# EAGLE board OVL_PANEL (EAGLE 7.7.0)
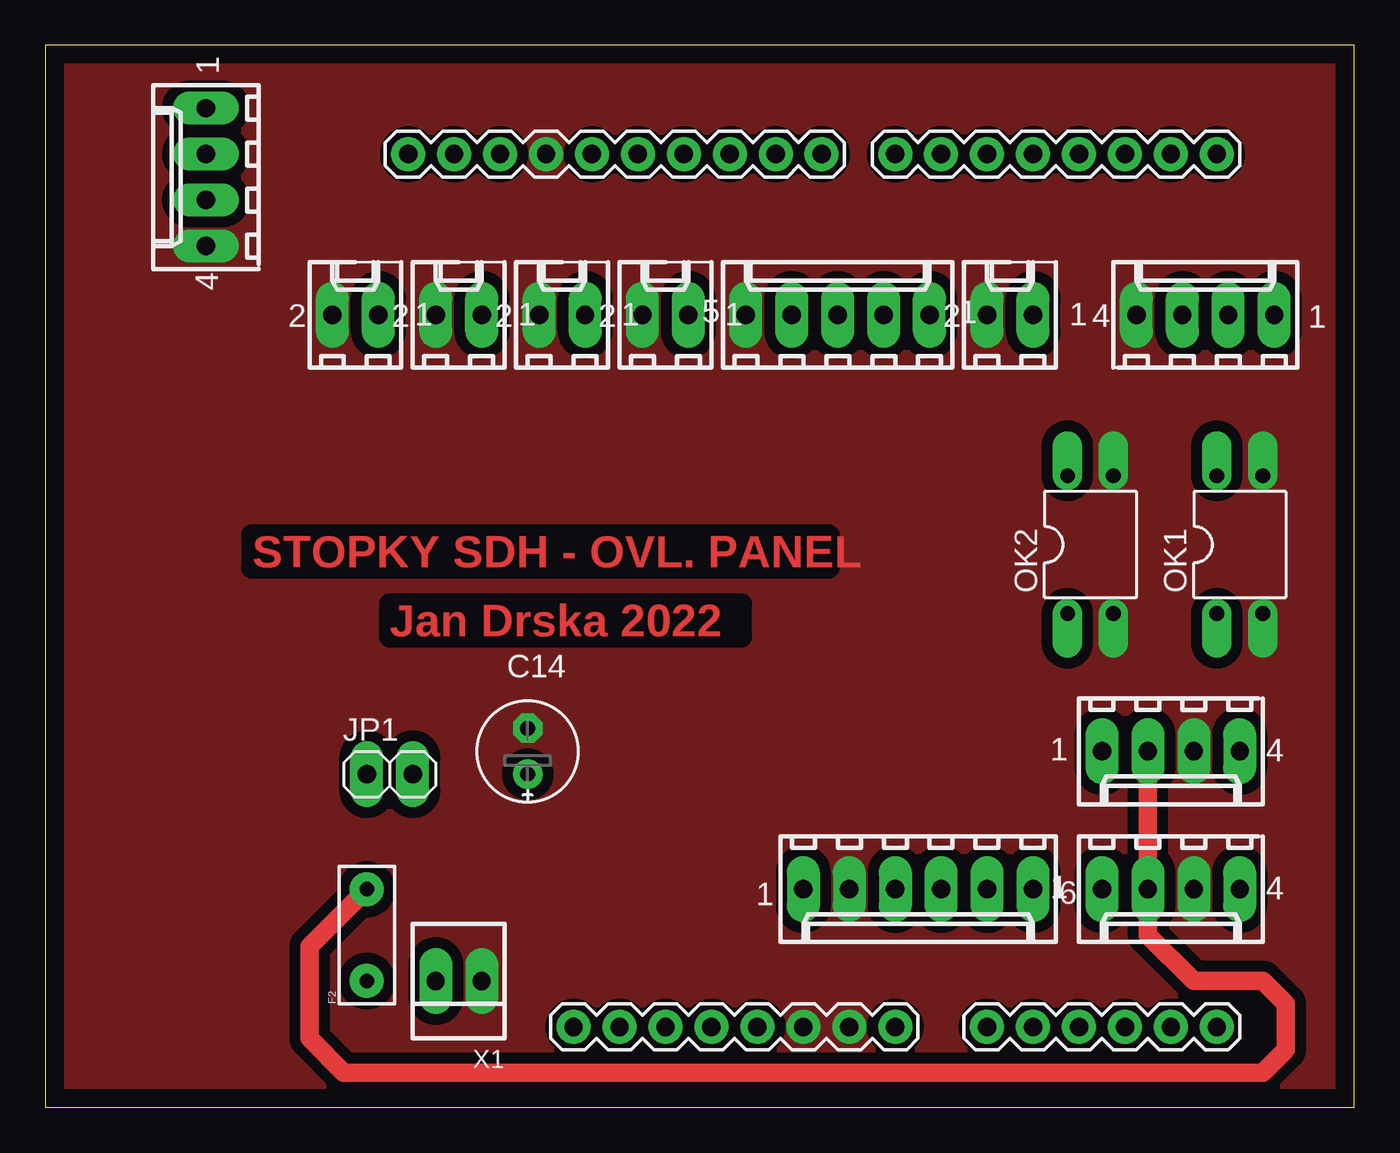
[diagram p0: board, top side]
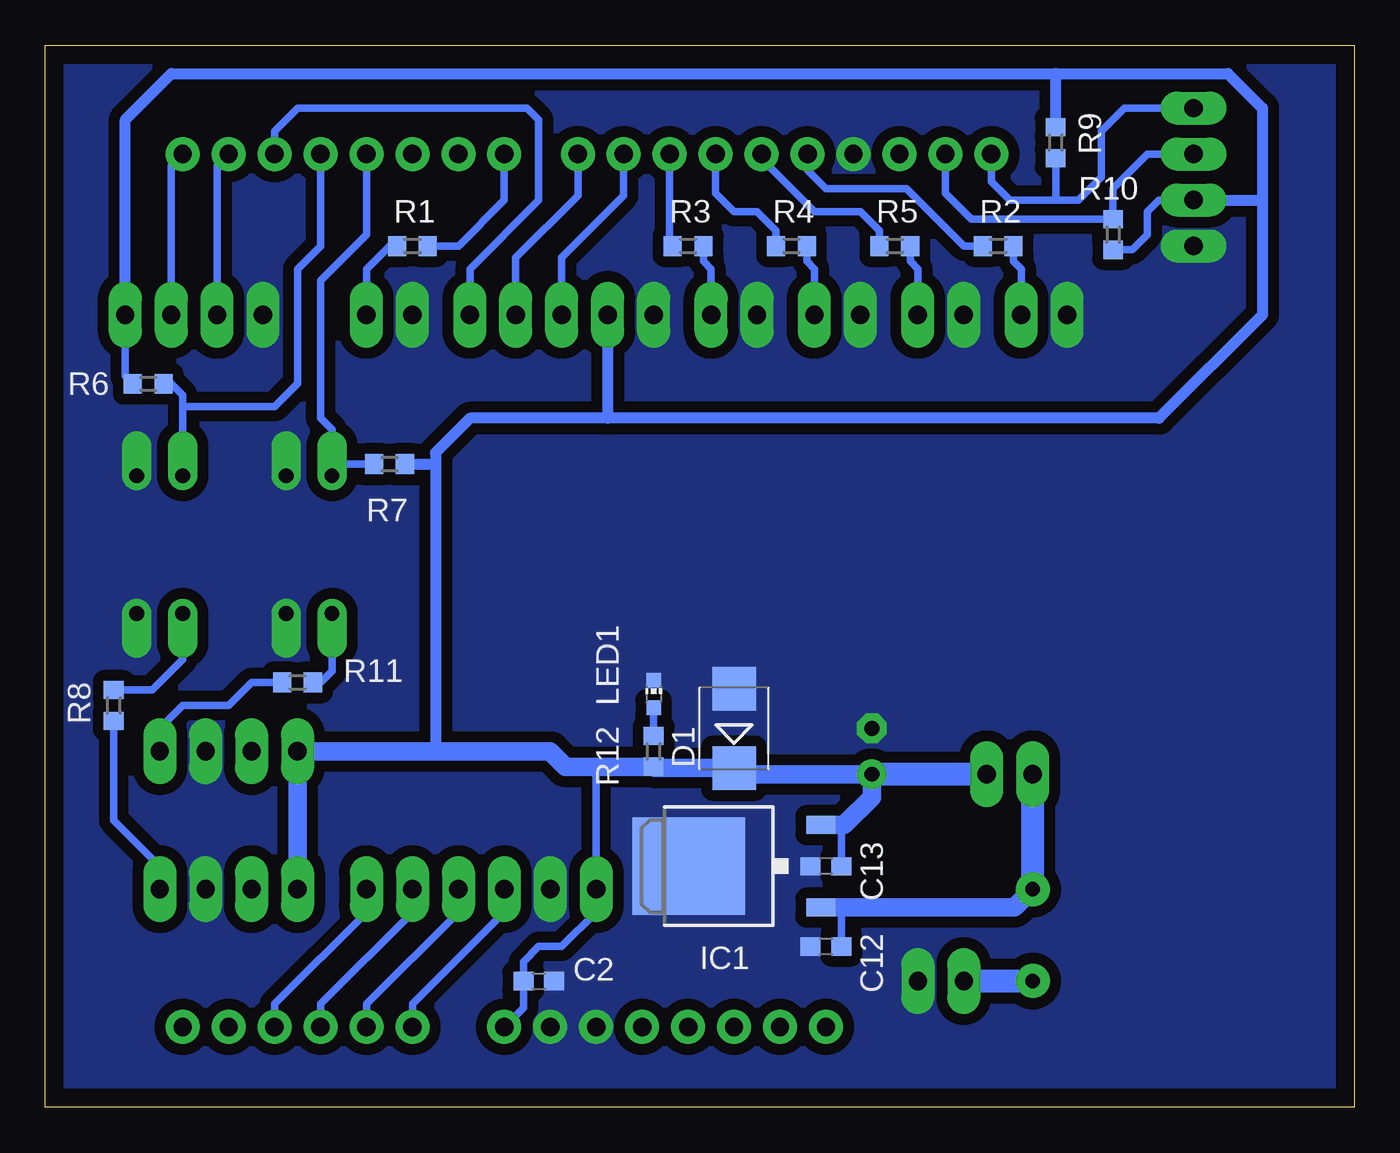
[diagram p1: board, bottom side, seen from below]

Size 72.37 x 58.73 mm. Coordinates in mm from the lower left corner, seen from the top.
Outline: 0,0 72.37,0 72.37,58.73 0,58.73 0,0
Copper layers (1*16): Top 0.035mm / dielectric 1.5mm / Bottom 0.035mm
Design rules "VUT": minimum track width 10mil, minimum drill 24mil, track to track 10mil, track to pad 8mil, pad to pad 8mil, via to via 8mil, smd to smd 8mil, copper to edge 40mil, drill to drill 8mil, minimum pad ring 16mil, minimum via ring 16mil, stop-mask expansion 4mil, vias tented up to drill 0mil, thermal gap 10mil

## Footprints (pad centres in the part's own frame; a part is rotated, then mirrored left to right if it is on the bottom)
C0603 = smd 1.1 x 1: 1 -0.85,0; 2 0.85,0
E2,5-6E = drill 0.813 pad 1.575: + -1.27,0 | drill 0.813 pad 1.575 octagon: - 1.27,0
SMB = smd 2.4 x 2.4: A 2.2,0; C -2.2,0
PTC = drill 0.8 pad 1.88: P$1 -2.54,0; P$2 2.54,0
6410-04 = drill 1.016 long: 1 3.81,0; 2 1.27,0; 3 -1.27,0; 4 -3.81,0
TO252 = smd 1 x 1.6: 1 -2.28,-4.8; 2 2.28,-4.8 | smd 5.4 x 6.2: 3 0,2.5
6410-05 = drill 1.016 long: 1 5.08,0; 2 2.54,0; 3 0,0; 4 -2.54,0; 5 -5.08,0
6410-02 = drill 1.016 long: 1 1.27,0; 2 -1.27,0
6410-06 = drill 1.016 long: 1 6.35,0; 2 3.81,0; 3 1.27,0; 4 -1.27,0; 5 -3.81,0; 6 -6.35,0
1X02 = drill 1.016 long: 1 -1.27,0; 2 1.27,0
CHIP-LED0603 = smd 0.8 x 0.8: A 0,-0.75; C 0,0.75
DIL04 = drill 0.813 offset: 1 -1.27,-3.81; 2 1.27,-3.81; 3 1.27,3.81; 4 -1.27,3.81
ARDUINO_UNO = drill 1.016 pad 1.88: 0 63.5,50.8; 1 60.96,50.8; 2 58.42,50.8; 3 55.88,50.8; 3.3V 35.56,2.54; 4 53.34,50.8; 5 50.8,50.8; 5V 38.1,2.54; 6 48.26,50.8; 7 45.72,50.8; 8 41.656,50.8; 9 39.116,50.8; 10 36.576,50.8; 11 34.036,50.8; 12 31.496,50.8; 13 28.956,50.8; A0 50.8,2.54; A1 53.34,2.54; A2 55.88,2.54; A3 58.42,2.54; A4 60.96,2.54; A5 63.5,2.54; AREF 23.876,50.8; GND 26.416,50.8; GND. 43.18,2.54; GND.. 40.64,2.54; I/OREF 30.48,2.54; N/C 27.94,2.54; RESET 33.02,2.54; SCL 18.796,50.8; SDA 21.336,50.8; VIN 45.72,2.54
R0603 = smd 1 x 1.1: 1 -0.85,0; 2 0.85,0
22-23-2021 = drill 1 long: 1 -1.27,0; 2 1.27,0

## Placement (x,y rotation side)
C2  100n  [C0603]  45.09,6.99 0 bottom
C12  220n  [C0603]  29.21,8.89 180 bottom
C13  100n  [C0603]  29.21,13.34 180 bottom
C14  220u  [E2,5-6E]  26.67,19.68 90 top
D1  6V  [SMB]  34.29,20.95 90 bottom
F2  PTCPTH  [PTC]  17.78,9.53 90 top
I2C  I2C_DISPLAY  [6410-04]  8.89,51.44 90 top
IC1  MC78M05A  [TO252]  34.29,13.34 90 bottom
J1  ENCODER  [6410-05]  43.81,43.81 0 top
J2  LED_RUN  [6410-02]  22.86,43.81 0 top
J6  SERIAL HW  [6410-04]  64.14,43.81 0 top
J7  EXT_IN_1  [6410-04]  62.23,12.06 180 top
J8  EXT_IN_2  [6410-04]  62.23,19.68 180 top
J9  LED_L  [6410-02]  17.14,43.81 0 top
J10  LED_R  [6410-02]  34.29,43.81 0 top
J11  LED_EMPTY  [6410-02]  28.57,43.81 0 top
J12  LED_READY  [6410-02]  53.34,43.81 0 top
J13  EXT_KEYBOARD  [6410-06]  48.26,12.06 180 top
JP1  [1X02]  19.05,18.41 0 top
LED1  [CHIP-LED0603]  38.73,22.86 0 bottom
OK1  EL817  [DIL04]  66.04,31.11 0 top
OK2  EL817  [DIL04]  57.78,31.11 0 top
PCB1  ARDUINO_UNO  [ARDUINO_UNO]  1.27,1.91 0 top
R1  120R  [R0603]  52.07,47.62 180 bottom
R2  120R  [R0603]  19.68,47.62 0 bottom
R3  120R  [R0603]  36.83,47.62 0 bottom
R4  120R  [R0603]  31.11,47.62 0 bottom
R5  200R  [R0603]  25.4,47.62 0 bottom
R6  10K  [R0603]  66.67,40.01 180 bottom
R7  10K  [R0603]  53.34,35.56 0 bottom
R8  330R  [R0603]  68.58,22.23 90 bottom
R9  [R0603]  16.51,53.34 90 bottom
R10  300R  [R0603]  13.34,48.26 270 bottom
R11  330R  [R0603]  58.42,23.5 0 bottom
R12  180R  [R0603]  38.73,19.68 270 bottom
X1  [22-23-2021]  22.86,6.99 180 top

## Library data of the parts
C2 C12-C14 R1-R12 = rcl
D1 = diode
F2 = SparkFun
I2C J1 J2 J6-J13 = con-molex; OC_FARNELL: unknown; OC_NEWARK: unknown
IC1 = linear
JP1 = pinhead
LED1 = led
OK1 OK2 = optocoupler; OC_FARNELL: 9707662; OC_NEWARK: unknown
PCB1 = E14_Arduino_revC
X1 = con-molex; MF: MOLEX; MPN: 22-23-2021; OC_FARNELL: 1462926; OC_NEWARK: 25C3832

## Nets
+5V: C2.1 C13.1 C14.+ D1.C I2C.3 IC1.2 J1.4 J6.1 J7.1 J8.1 J13.1 JP1.2 PCB1.VIN R6.2 R7.2 R9.2 R10.2 R12.2
+12V: C12.1 F2.P$2 IC1.1 J7.2 J8.2 JP1.1
ENC_A: J1.2 PCB1.8
ENC_B: J1.3 PCB1.9
ENC_BTN: J1.1 PCB1.2
EXT_ENABLE: J13.6 PCB1.A3
EXT_IN1: OK1.4 PCB1.3 R6.1
EXT_IN2: OK2.4 PCB1.4 R7.1
EXT_RESET: J13.5 PCB1.A2
EXT_START: J13.3 PCB1.A0
EXT_STOP: J13.4 PCB1.A1
GND: C2.2 C12.2 C13.2 C14.- D1.A I2C.4 IC1.3 J1.5 J2.2 J6.4 J7.3 J8.3 J9.2 J10.2 J11.2 J12.2 J13.2 LED1.C OK1.2 OK1.3 OK2.2 OK2.3 PCB1.GND PCB1.GND. PCB1.GND.. X1.1
LED_EMPTY: PCB1.11 R4.1
LED_L: PCB1.13 R2.1
LED_R: PCB1.10 R3.1
LED_READY: PCB1.7 R1.1
LED_RUN: PCB1.12 R5.1
N$2: J12.1 R1.2
N$3: J2.1 R5.2
N$4: J9.1 R2.2
N$5: J10.1 R3.2
N$6: J11.1 R4.2
N$8: F2.P$1 X1.2
N$9: J7.4 R8.1
N$10: J8.4 R11.1
N$11: LED1.A R12.1
N$15: OK2.1 R11.2
N$18: OK1.1 R8.2
RX1: J6.2 PCB1.0
SCL: I2C.1 PCB1.SCL R9.1
SDA: I2C.2 PCB1.SDA R10.1
TX1: J6.3 PCB1.1

## Tracks (layer width: path | path; a pad name or v marks a point on that pad's centre or on a via)
+5V
  Bottom 0.406: I2C.3 10.79,50.16 11.43,49.53 11.43,48.26 12.28,47.41 R10.2 | PCB1.VIN 45.94,5.5 C2.1 45.94,8.04 45.09,8.89 43.81,8.89 41.91,10.79 J13.1 41.91,18.84 | C13.1 28.36,15.46 28.2,15.62 | J6.1 67.94,40.42 R6.2
  Bottom 0.61: J6.1 67.94,54.61 65.41,57.15 16.51,57.15 | 16.51,57.15 6.99,57.15 5.08,55.24 5.08,50.16 | 5.08,50.16 5.08,43.81 10.79,38.1 41.27,38.1 | 41.27,38.1 48.9,38.1 50.8,36.2 50.8,35.56 | 50.8,35.56 50.8,19.68 | R7.2 50.8,35.56 | J1.4 41.27,38.1 | I2C.3 5.08,50.16 | R9.2 16.51,57.15
  Bottom 1.016: J7.1 J8.1 50.8,19.68 44.45,19.68 43.6,18.84 41.91,18.84 R12.2 38.66,18.75 D1.C 33.95,18.41 C14.+ 26.67,17.14 28.2,15.62 IC1.2
  Bottom 1.27: JP1.2 C14.+
+12V
  Top 1.016: J8.2 J7.2 60.96,9.53 63.5,6.99 67.31,6.99 68.58,5.71 68.58,3.17 67.31,1.91 16.51,1.91 14.61,3.81 14.61,8.89 F2.P$2
  Bottom 0.406: 28.57,11.05 28.16,10.84 28.36,10.63 C12.1
  Bottom 1.016: IC1.1 28.57,11.05 18.79,11.05 F2.P$2
  Bottom 1.27: F2.P$2 JP1.1
ENC_A
  Bottom 0.406: PCB1.8 42.93,50.42 46.35,46.99 J1.2
ENC_B
  Bottom 0.406: PCB1.9 40.39,50.42 43.81,46.99 J1.3
ENC_BTN
  Bottom 0.406: J1.1 48.9,46.35 45.09,50.16 45.09,54.61 45.72,55.24 58.42,55.24 59.69,53.98 PCB1.2
EXT_ENABLE
  Bottom 0.406: PCB1.A3 59.69,5.71 54.61,10.79 J13.6
EXT_IN1
  Bottom 0.406: PCB1.3 57.15,47.62 58.42,46.35 58.42,40.01 59.69,38.73 64.77,38.73 | 64.77,38.73 OK1.4 | R6.1 65.41,40.01 64.77,39.37 64.77,38.73
EXT_IN2
  Bottom 0.406: PCB1.4 54.61,48.26 57.15,45.72 57.15,38.1 56.52,37.47 56.52,35.56 | OK2.4 56.52,35.56 | R7.1 56.52,35.56
EXT_RESET
  Bottom 0.406: PCB1.A2 57.15,5.71 52.07,10.79 J13.5
EXT_START
  Bottom 0.406: PCB1.A0 52.07,5.71 46.99,10.79 J13.3
EXT_STOP
  Bottom 0.406: PCB1.A1 54.61,5.71 49.53,10.79 J13.4
GND
  pour Top (isolate 0.61, no thermals): 0,59.05 72.39,59.05 72.39,0 0,0
  pour Bottom (isolate 0.61, no thermals): 0,59.05 72.39,59.05 72.39,0 0,0
LED_EMPTY
  Bottom 0.406: PCB1.11 35.31,50.55 34.29,49.53 33.02,49.53 31.96,48.48 R4.1
LED_L
  Bottom 0.406: PCB1.13 30.23,51.82 29.21,50.8 24.77,50.8 21.59,47.62 R2.1
LED_R
  Bottom 0.406: PCB1.10 37.85,47.79 R3.1
LED_READY
  Bottom 0.406: R1.1 49.53,47.62 46.99,50.16 PCB1.7
LED_RUN
  Bottom 0.406: R5.1 26.25,48.48 27.3,49.53 29.84,49.53 32.77,52.45 PCB1.12
N$2
  Bottom 0.406: R1.2 53.34,47.62 54.61,46.35 J12.1
N$3
  Bottom 0.406: J2.1 24.13,46.35 24.55,46.77 R5.2
N$4
  Bottom 0.406: J9.1 18.41,46.35 18.84,46.77 R2.2
N$5
  Bottom 0.406: J10.1 35.56,46.35 35.98,46.77 R3.2
N$6
  Bottom 0.406: J11.1 29.84,46.35 30.27,46.77 R4.2
N$8
  Bottom 1.27: X1.2 F2.P$1
N$9
  Bottom 0.406: J7.4 66.04,13.34 68.58,15.88 R8.1
N$10
  Bottom 0.406: J8.4 66.04,20.95 64.77,22.23 62.23,22.23 60.96,23.5 R11.1
N$11
  Bottom 0.406: R12.1 LED1.A
N$15
  Bottom 0.406: OK2.1 56.52,24.13 57.15,23.5 R11.2
N$18
  Bottom 0.406: R8.2 66.46,23.07 64.77,24.77 OK1.1
RX1
  Bottom 0.406: J6.2 65.41,52.07 PCB1.0
SCL
  Bottom 0.406: I2C.1 12.7,55.24 13.97,53.98 13.97,51.44 15.24,50.16 16.51,50.16 | 16.51,50.16 19.05,50.16 20.07,51.18 PCB1.SCL | R9.1 16.51,50.16
SDA
  Bottom 0.406: PCB1.SDA 22.61,50.55 21.17,49.11 R10.1 13.34,50.8 11.43,52.7 I2C.2
TX1
  Bottom 0.406: J6.3 62.87,52.07 PCB1.1

## Text on the board
Top: STOPKY SDH - OVL. PANEL | Jan Drska 2022